# Altium PCB Sensors-PCB.PcbDoc
Units mm, origin at the board's own origin, x right, y up, seen from the top; angles counter-clockwise.
Board outline 60 x 28 mm, 2 copper layers (Top Layer, Bottom Layer); 13 components, 8 nets, 54 pads, 133 vias.
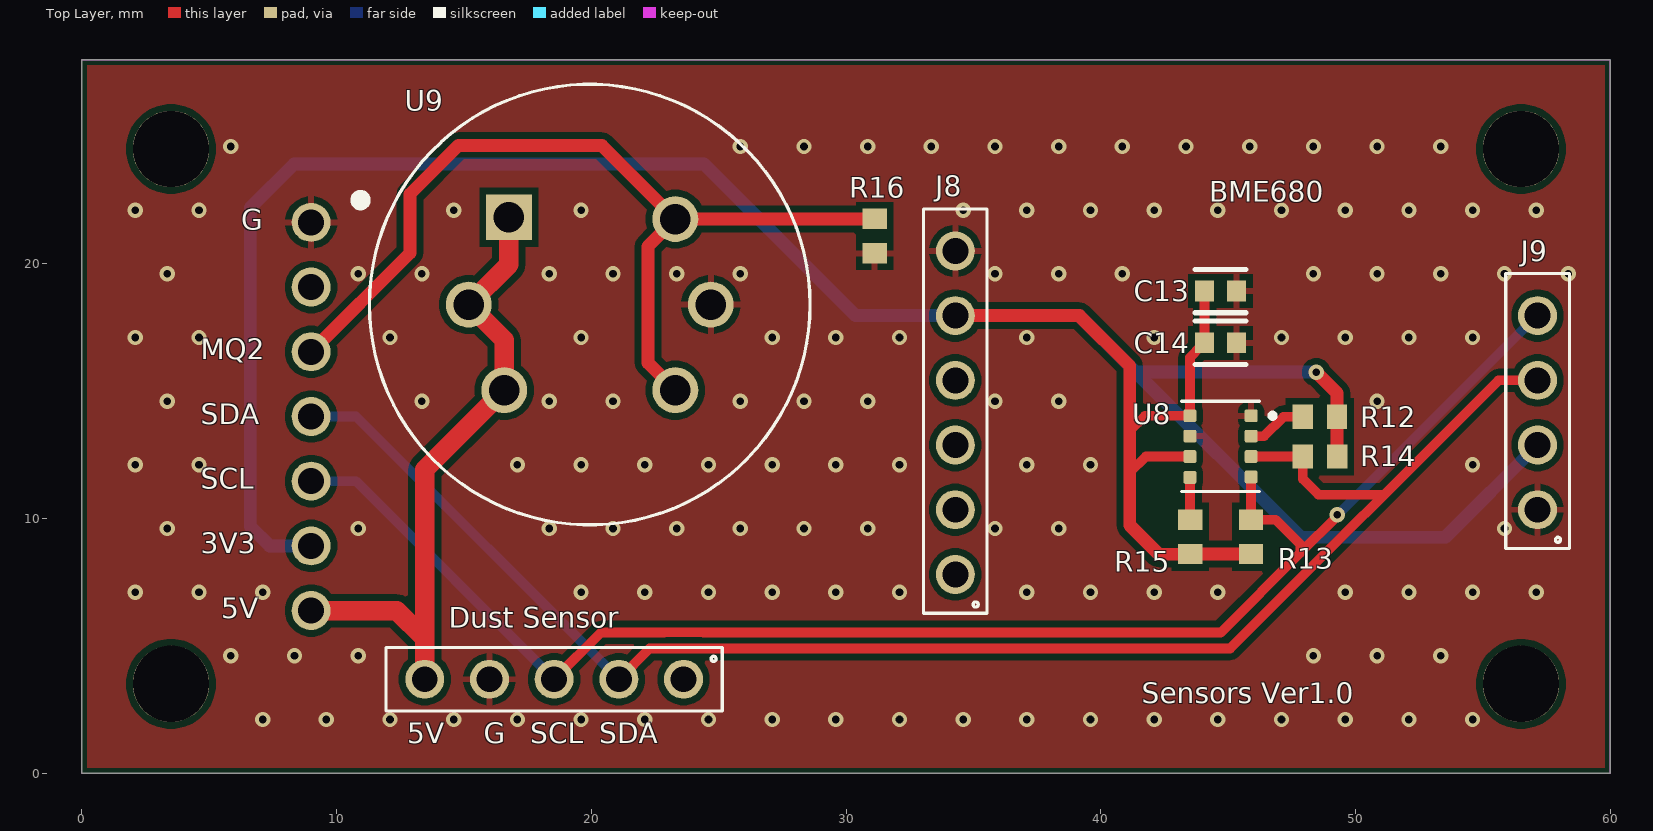
[diagram p0: Top Layer view]
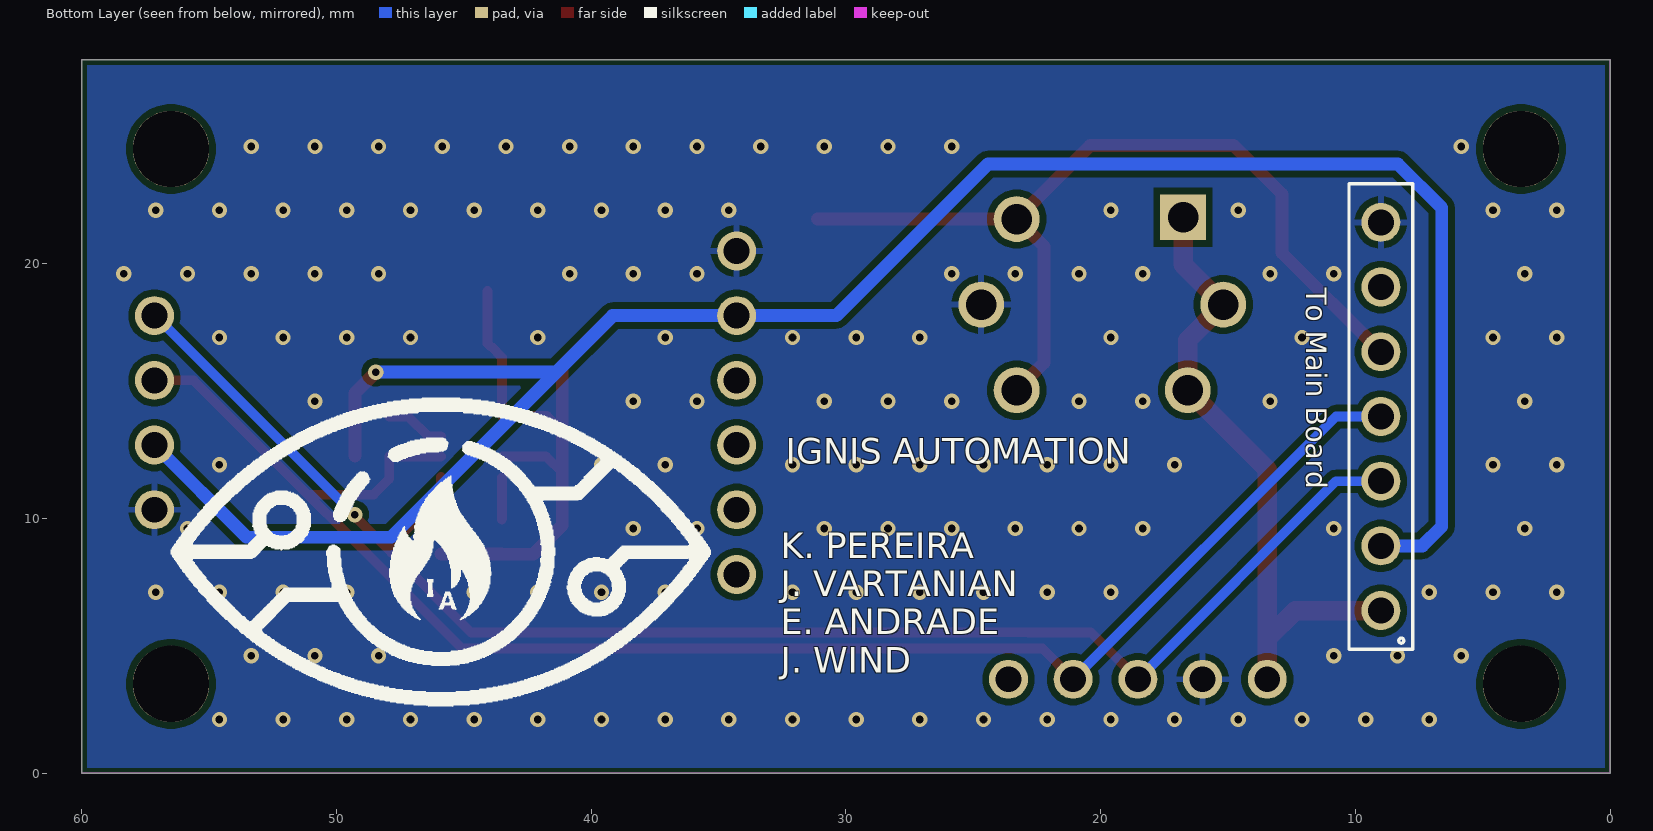
[diagram p1: Bottom Layer view, seen from below]
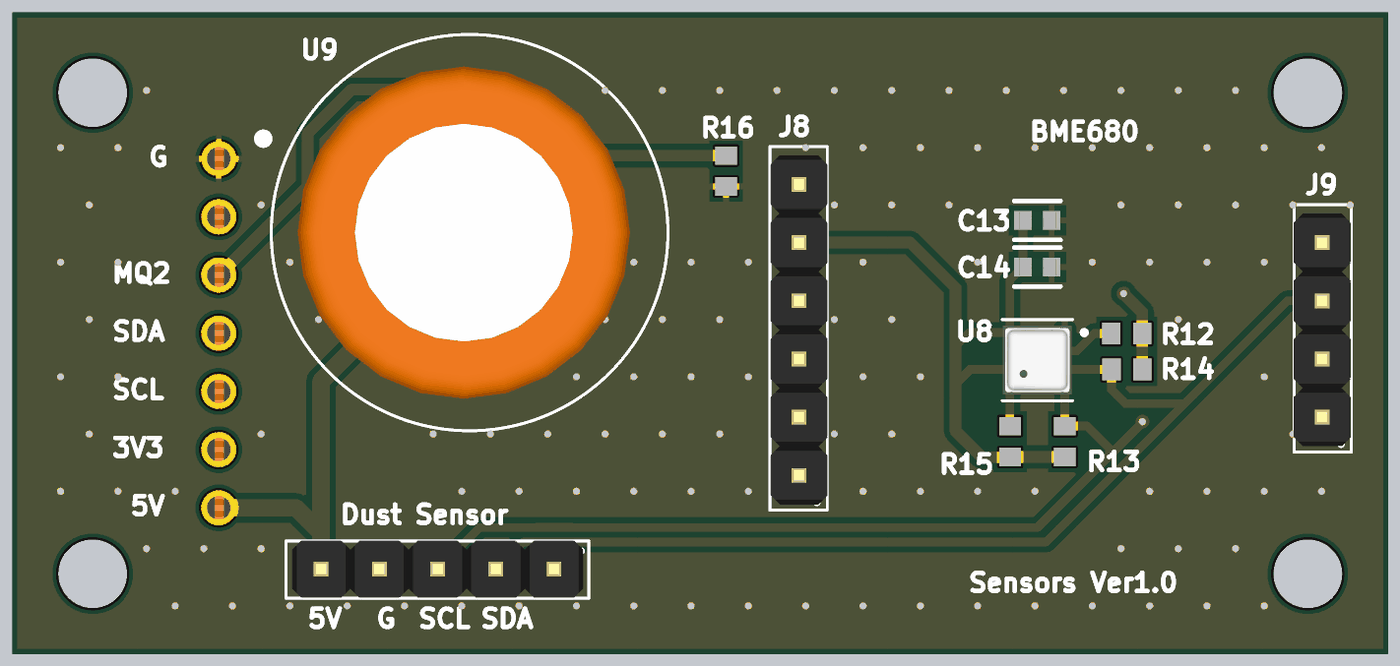
[diagram p2: 3D render of the assembled board from above, using the file's embedded part models]

## Layer stack, top to bottom
Top Solder: solder mask 0.0102, Solder Resist, Dk 3.5
Top Layer: signal copper 0.0356
Dielectric 1: dielectric 0.32, FR-4, Dk 4.8
Bottom Layer: signal copper 0.0356
Bottom Solder: solder mask 0.0102, Solder Resist, Dk 3.5

## Board outline
0,0 60,0 60,28 0,28

## Design rules (kind name [scope] priority, off if disabled: settings)
Clearance Clearance_1 [InNamedPolygon('NONET_L-01_P-001') Or InNamedPolygon('NONET_L-01_P-001') vs OnLayer('Keep-Out Layer')] p1: gap=0.2 ignorepadtopadclearanceinfootprint=FALSE
Clearance [All] p2: gap=0.254 ignorepadtopadclearanceinfootprint=FALSE except(0: Arc-Hole Track-Hole SMDPad-Hole THPad-Hole Via-Hole Fill-Hole Poly-Hole Region-Hole Text-Hole)
HoleSize Via [IsVia] p1: absolutevalues=TRUE maxlimit=6.3 minlimit=0.3 maxpercent=80.000 minpercent=20.000
HoleSize [All] p2: absolutevalues=TRUE maxlimit=6.3 minlimit=0.2 maxpercent=80.000 minpercent=20.000
HoleToHoleClearance [All] p1: gap=0.5 allowstackedmicrovias=TRUE
MinimumAnnularRing [All] p1: minimumring=0.13
MinimumSolderMaskSliver [All] p1: minsoldermaskwidth=0.2
PolygonConnect [All] p1: connectstyle=Relief reliefconductorwidth=0.254 reliefentries=4 polygonreliefangle="90 Angle" airgapwidth=0.254
RoutingVias [All] p1: holewidth=0.711 width=1.27 viastyle="Through Hole" minholewidth=0.711 minwidth=1.27 maxholewidth=0.711 maxwidth=1.27
SilkToSolderMaskClearance [IsPad] p1: minsilkscreentomaskgap=0.15 clearancetoexposedcopper=TRUE
SolderMaskExpansion [All] p1: expansion=0.102 istentingtop=FALSE
Width [All] p1: maxlimit=1.016 minlimit=0.254 preferedwidth=0.381
26 further rules are at their usual default settings.

## Components (designator, comment, footprint, x,y, rotation, side; value= is the part's Value field where it differs from the comment)
C13 "0.1uF" FP-CL10-IPC_C 44.704,18.923 r180 top
C14 "0.1uF" FP-CL10-IPC_C 44.704,16.891 r180 top
"Dust Sensor" "Optical Dust Sensor" 61300711821#1 16.002,3.683 r180 top (schematic designator J7)
J8 "BME-680-L" 61300711821#2 34.29,15.418 r90 top
J9 "BME-680-S" 61300711821#3 57.15,17.958 r90 top
R12 "4k7" RESC1608X55X30NL15T15 48.601,13.991 r0 top
R13 "4k7" RESC1608X55X30NL15T15 45.9,9.274 r270 top
R14 "4k7" RESC1608X55X30NL15T15 48.612,12.423 r180 top
R15 "4k7" RESC1608X55X30NL15T15 43.517,9.274 r90 top
R16 "10k" RESC1608X55X30NL15T15 31.125,21.082 r90 top
"To Main Board" "To Main Board" 61300711821#4 9,14 r90 bottom (schematic designator J10)
U8 "BME680" PSON80P300X300X100-8N 44.704,12.827 r0 top
U9 "MQ-2" XDCR_SEN-08880 19.941,18.392 r0 top

## Footprints (in the part's own frame and the unit in brackets; to place one, negate y for a bottom-side part, rotate by r counter-clockwise, add the part's x,y. Pads: shape width x height; smd on the part's side, far side on the other; paste and mask are expansions set on the pad)
61300711821#1 [mm]
  round 1.53 hole 1.02: 1(-7.62,0) 2(-5.08,0) 3(-2.54,0) 4(0,0) 5(2.54,0)
  silkscreen extent -9.14,-1.25 4.06,1.25, body extent -8.89,-1.27 3.81,1.23, height 10.54
61300711821#2 [mm]
  round 1.53 hole 1.02: 1(-7.62,0) 2(-5.08,0) 3(-2.54,0) 4(0,0) 5(2.54,0) 6(5.08,0)
  silkscreen extent -9.14,-1.25 6.73,1.25, body extent -8.89,-1.27 6.35,1.23, height 10.54
61300711821#3 [mm]
  round 1.53 hole 1.02: 1(-7.62,0) 2(-5.08,0) 3(-2.54,0) 4(0,0)
  silkscreen extent -9.14,-1.25 1.65,1.25, body extent -8.89,-1.23 1.27,1.27, height 10.54
61300711821#4 [mm]
  round 1.53 hole 1.02: 1(-7.62,0) 2(-5.08,0) 3(-2.54,0) 4(0,0) 5(2.54,0) 6(5.08,0) 7(7.62,0)
  silkscreen extent -9.14,-1.25 9.14,1.25, body extent -9.14,-1.23 9.14,1.27, height 8.55
FP-CL10-IPC_C [mm]
  rect 0.758x0.812 smd paste+0 mask+0: 1(-0.627,0) 2(0.627,0)
  silkscreen extent -1.01,-0.85 1.01,0.85, body extent -1.11,-0.55 1.11,0.55, height 0.25
PSON80P300X300X100-8N [mm]
  rrect25% 0.5x0.5 smd mask+0.02: 1(1.2,1.2) 2(1.2,0.4) 3(1.2,-0.4) 4(1.2,-1.2) 5(-1.2,-1.22) 6(-1.2,-0.4) 7(-1.2,0.4) 8(-1.2,1.2)
  silkscreen extent -1.53,-1.77 2.14,1.77, body extent -1.5,-1.5 1.5,1.5, height 1
RESC1608X55X30NL15T15 [mm] "Chip Resistor, 2-Leads, Body 1.60x0.80mm, IPC Medium Density"
  rect 0.8x0.95 smd: 1(-0.675,0) 2(0.675,0)
  body extent -0.87,-0.48 0.87,0.48, height 0.55
XDCR_SEN-08880 [mm]
  rect 1.8x1.8 hole 1.2: 1(-3.175,3.429)
  round 1.8 hole 1.2: 2(-4.75,0) 3(-3.359,-3.359) 4(3.359,-3.359) 5(4.75,0) 6(3.359,3.359)
  silkscreen extent -9.2,-8.65 8.65,8.65, body extent -7.5,-7.25 7,7.25, height 10.5

## Part data
C13 C14: library part CMP-13271-003248-1, "Cap Ceramic 10uF 10V X5R ±20% Pad SMD 0603 +85°C T/R", Capacitance=10uF, Case Code (Imperial)=0603, Case Code (Metric)=1608, Dielectric=X5R, Max Operating Temperature=85°C, Min Operating Temperature=-55°C, Package Quantity=1, Tolerance=20%, Voltage Rating=10V, Case/Package=0603, Contact Plating=Tin, Depth=0.8mm, Height=0.8mm, Lead Free="Lead Free", Length=1.6mm, Mount="Surface Mount", Packaging="Tape and Reel", Radiation Hardening=No, Thickness=0.035inch, Voltage Rating (DC)=10V, Width=0.031inch
"Dust Sensor": library part 61300711821, "5 Pin"
J8: library part 61300711821, "6 Pin"
J9: library part 61300711821, "4 Pin"
R12 R13 R14 R15 R16: library part CMP-2000-00180-1, Manufacturer=Panasonic, Part Number=ERJ-3EKF1001V
"To Main Board": library part 61300711821, "7 Pin"
U8: "Gas, Humidity, Pressure, Temperature Sensor"

## Free pads (board coordinates)
  round 3 hole 3 unplated: ""(3.5,3.5) ""(3.5,24.5) ""(56.5,3.5) ""(56.5,24.5)

## Via types
v1: diameter 0.6, hole 0.3, Top Layer to Bottom Layer, tented both sides, 133 vias

## Nets (pads, with @x,y where several pads share a name; then routed paths per layer and width w, separated by ;. In a path a pad name is that pad's centre, name@x,y a point inside that pad or via, vN(x,y) a via of type N, cw(c..) or ccw(c..) an arc to the next point about the centre after c; other vN are vias at no path point)
3V3: "To Main Board.2" C13.2 C14.2 J8.5 J9.2 R12.2 R13.2 R14.1 R15.1 U8.6 U8.8 | length 114.3
  Top Layer w0.381: 41.139,11.795 41.771,12.427 U8.6 ; 41.139,13.432 41.734,14.027 U8.8 43.504,16.318 43.925,16.739 43.952,16.739 44.077,16.864 C14.2 C13.2
  Top Layer w0.508: J8.5 39.162,17.958 41.139,15.981 41.139,13.432 41.139,11.795 41.139,9.731 42.28,8.59 43.508,8.59 R15.1 R13.2 ; v1(48.466,15.731) 49.282,14.915 R14.1@49.282,12.439
  Bottom Layer w0.508: 9,8.92 7.372,8.92 6.611,9.681 6.611,22.19 8.328,23.907 24.434,23.907 30.383,17.958 J8.5 39.162,17.958 41.38,15.74 ; v1(48.466,15.731) 48.457,15.74 41.38,15.74 ; J9.2 53.529,9.257 47.863,9.257 41.38,15.74
5V: "Dust Sensor.5" "To Main Board.1" U9.1 U9.2 U9.3 | length 25.6
  Top Layer w0.762: 9,6.38 12.358,6.38 13.462,5.276 ; 13.462,3.683 13.462,5.276 ; U9.1 16.766,19.967 U9.2 16.582,17.001 U9.3 13.462,11.913 13.462,5.276
GND: "Dust Sensor.4" "To Main Board.7" C13.1 C14.1 J8.6 J9.1 R16.1 U8.1 U8.7 U9.5
  other v1: 7.1,2.1 9.6,2.1 12.1,2.1 14.6,2.1 17.1,2.1 19.6,2.1 22.1,2.1 24.6,2.1 27.1,2.1 29.6,2.1 32.1,2.1 34.6,2.1 37.1,2.1 39.6,2.1 42.1,2.1 44.6,2.1 47.1,2.1 49.6,2.1 52.1,2.1 54.6,2.1 5.85,4.6 8.35,4.6 10.85,4.6 48.35,4.6 50.85,4.6 53.35,4.6 2.1,7.1 4.6,7.1 7.1,7.1 19.6,7.1 22.1,7.1 24.6,7.1 27.1,7.1 29.6,7.1 32.1,7.1 37.1,7.1 39.6,7.1 42.1,7.1 44.6,7.1 49.6,7.1 52.1,7.1 54.6,7.1 57.1,7.1 3.35,9.6 10.85,9.6 18.35,9.6 20.85,9.6 23.35,9.6 25.85,9.6 28.35,9.6 30.85,9.6 35.85,9.6 38.35,9.6 55.85,9.6 2.1,12.1 4.6,12.1 17.1,12.1 19.6,12.1 22.1,12.1 24.6,12.1 27.1,12.1 29.6,12.1 32.1,12.1 37.1,12.1 39.6,12.1 54.6,12.1 3.35,14.6 13.35,14.6 18.35,14.6 20.85,14.6 25.85,14.6 28.35,14.6 30.85,14.6 35.85,14.6 38.35,14.6 50.85,14.6 2.1,17.1 4.6,17.1 12.1,17.1 19.6,17.1 27.1,17.1 29.6,17.1 32.1,17.1 37.1,17.1 42.1,17.1 47.1,17.1 49.6,17.1 52.1,17.1 54.6,17.1 3.35,19.6 10.85,19.6 13.35,19.6 18.35,19.6 20.85,19.6 23.35,19.6 25.85,19.6 35.85,19.6 38.35,19.6 40.85,19.6 48.35,19.6 50.85,19.6 53.35,19.6 55.85,19.6 58.35,19.6 2.1,22.1 4.6,22.1 14.6,22.1 19.6,22.1 34.6,22.1 37.1,22.1 39.6,22.1 42.1,22.1 44.6,22.1 47.1,22.1 49.6,22.1 52.1,22.1 54.6,22.1 57.1,22.1 5.85,24.6 25.85,24.6 28.35,24.6 30.85,24.6 33.35,24.6 35.85,24.6 38.35,24.6 40.85,24.6 43.35,24.6 45.85,24.6 48.35,24.6 50.85,24.6 53.35,24.6
MQ2-Outside: "To Main Board.5" R16.2 U9.4 U9.6 | length 35.6
  Top Layer w0.508: 9,16.54 12.879,20.419 12.879,22.732 14.782,24.635 20.415,24.635 U9.6 ; U9.4 22.227,16.106 22.227,20.678 U9.6 ; R16.2@31.125,21.751 U9.6
NetR12_1: R12.1 U8.2 | length 2.3
  Top Layer w0.381: U8.2 46.418,13.227 47.178,13.986 47.921,13.986 R12.1
NetR15_2: R15.2 U8.5 | length 1.7
  Top Layer w0.381: U8.5 43.504,9.962 R15.2
SCL: "Dust Sensor.3" "To Main Board.3" J9.4 R13.1 U8.4 | length 61.7
  Top Layer w0.381: 18.542,3.683 20.381,5.522 22.852,5.522 22.858,5.527 24.386,5.527 24.392,5.522 44.714,5.522 47.845,8.653 ; U8.4 45.902,11.625 45.902,9.951 R13.1 46.864,9.949 47.845,8.968 47.845,8.653 ; v1(49.287,10.142) 49.287,10.095 47.845,8.653
  Bottom Layer w0.381: 9,11.46 10.765,11.46 18.542,3.683 ; v1(49.287,10.142) 49.311,10.142 57.126,17.958 J9.4
SDA: "Dust Sensor.2" "To Main Board.4" J9.3 R14.2 U8.3 | length 63.6
  Top Layer w0.381: 21.082,3.683 22.286,4.887 23.115,4.887 23.121,4.892 24.123,4.892 24.129,4.887 45.084,4.887 55.616,15.418 J9.3 ; U8.3 47.933,12.427 R14.2 47.937,11.542 48.548,10.931 51.124,10.931
  Bottom Layer w0.381: 9,14 10.765,14 21.082,3.683
pads on no net: "Dust Sensor.1" "To Main Board.6" J8.1 J8.2 J8.3 J8.4

## Polygon pours and split planes (outlines as drawn)
GND on Bottom Layer "NONET_L-01_P-001" (solid, pour order 1): 0,28 60,28 60,0.001 0,0
GND on Top Layer "NONET_L-01_P-001" (solid, remove dead copper, pour order 0): 0,0 0,28 60,28 60,0 0,0

## Keep-outs
Keep-Out Layer:
  the board outline again, w0.025

## Silkscreen, mask and mechanical layers (free items; w line width, h text height)
Top Overlay:
  text "BME680" at 44.269,22.425 h0.8
  text "G" at 6.267,21.324 h0.8
  text "MQ2" at 4.667,16.244 h0.8
  text "SDA" at 4.667,13.704 h0.8
  text "SCL" at 4.667,11.164 h0.8
  text "3V3" at 4.667,8.624 h0.8
  text "5V" at 5.467,6.084 h0.8
  text "Sensors Ver1.0" at 41.602,2.74 h0.8
  text "5V" at 12.774,1.17 h0.8
  text "G" at 15.769,1.17 h0.8
  text "SCL" at 17.598,1.17 h0.8
  text "SDA" at 20.318,1.17 h0.8
Bottom Overlay:
  drawing of 6 lines, arcs and shapes, not listed
  text "IGNIS AUTOMATION" at 32.363,12.142 h1
  text "K. PEREIRA / J. VARTANIAN / E. ANDRADE / J. WIND" at 32.563,3.942 h1
Mechanical 1:
  the board outline again, w0.025